# Altium PCB Minna_V01.PcbDoc (part 2 of 2)
Units mil, origin at the board's own origin, x right, y up, seen from the top; angles counter-clockwise.
Board outline 3650 x 2200 mil, 2 copper layers (Top Layer, Bottom Layer), stack 64.8 mil thick; 102 components, 109 nets, 591 pads, 273 vias.
Unrouted connection lines stored in the file: 80.
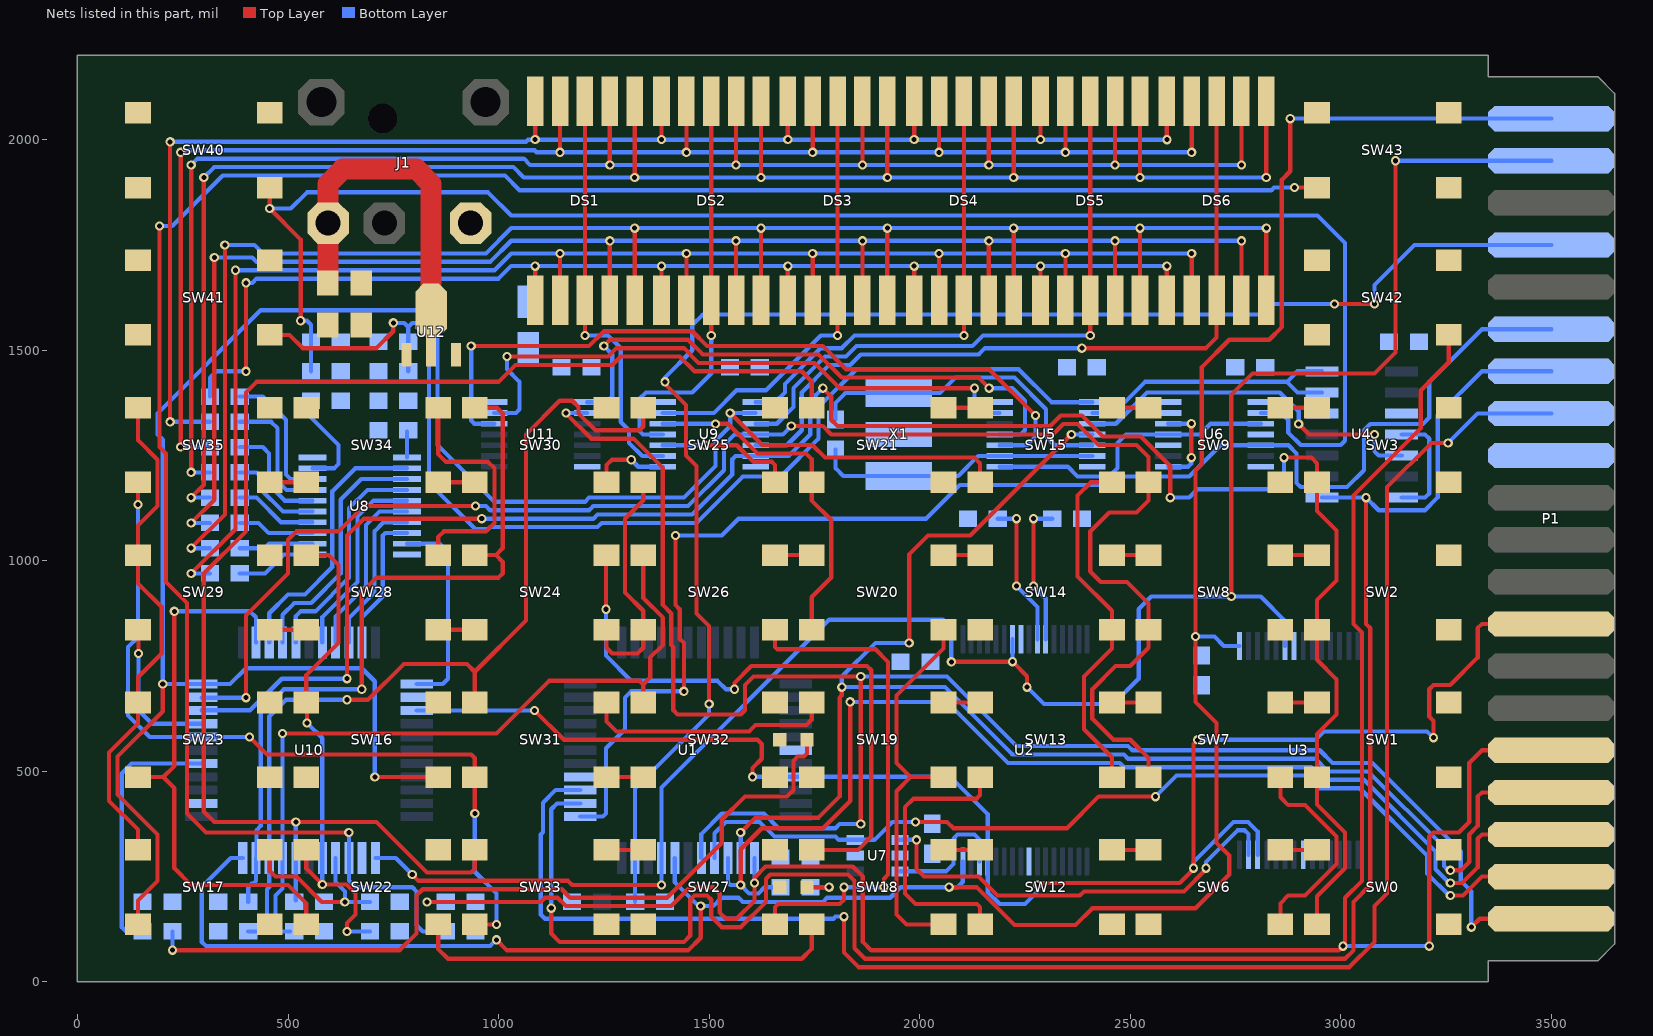
[diagram p2: the nets of this part, all layers, seen from the top]

## Via types
v1: diameter 22, hole 12, Top Layer to Bottom Layer, 273 vias

## Nets (pads, with @x,y where several pads share a name; then routed paths per layer and width w, separated by ;. In a path a pad name is that pad's centre, name@x,y a point inside that pad or via, vN(x,y) a via of type N, cw(c..) or ccw(c..) an arc to the next point about the centre after c; other vN are vias at no path point) (continued)
D7: P1.13 U1.8 U2.29 U3.26 U10.25 | length 3937
  Top Layer w10: v1(1085.51,644.49) 1155,575 1615,575 1625,565 1625,530 1602.99,507.99 v1(1602.99,487.01) ; v1(2280,230) 2285,230 2285,235 2617.53,235 v1@2651.26,268.74 ; v1(2650,270) 2650,565 v1(2660,575) ; v1(3220,580) 3220,620 3210,630 3210,695 3220,705 3260,705 3325,770 3325,840 3335,850 P1.13@3500,850
  Bottom Layer w10: U10.25@805.91,644.49 v1(1085.51,644.49) ; v1(1602.99,487.01) U1.8@1705.91,487.01 2072.99,487.01 2161.42,398.58 U2.29@2161.42,286.22 2161.42,213.58 2190,185 2250,185 2280,215 v1(2280,230) ; v1(2650,270) 2650,285 2745,380 2780,380 2802.56,357.44 U3.26@2802.56,301.97 ; v1(2660,575) 2940,575 2960,595 3205,595 v1(3220,580)
DATAIN: U10.35
DATAOUT: R27.1 U10.5 | length 617.5
  Bottom Layer w10: R27.1@154.57,120 115,120 105,130 105,495 128.5,518.5 U10.5@294.09,518.5
DS_A: DS1.7 DS2.7 DS3.7 DS4.7 DS5.7 DS6.7 R14.2 | length 4187.7
  Top Layer w10: v1(270,1210) v1(270,1940) ; v1(1264.06,1940.11) DS1.7@1264.06,2091.22 ; v1(1564.06,1940.11) DS2.7@1564.06,2091.22 ; v1(1864.06,1940.11) DS3.7@1864.06,2091.22 ; v1(2164.06,1940.11) DS4.7@2164.06,2091.22 ; v1(2464.06,1940.11) DS5.7@2464.06,2091.22 ; v1(2764,1940) DS6.7@2764.06,2091.22
  Bottom Layer w10: v1(270,1210) R14.2@314.57,1210 ; v1(270,1940) 285,1955 1060,1955 1074.94,1940.06 v1@2764,1940.06
DS_B: DS1.6 DS2.6 DS3.6 DS4.6 DS5.6 DS6.6 R15.2 | length 4446.5
  Top Layer w10: v1(270,1150) 300,1180 v1(300,1910) ; v1(1323.11,1910.22) DS1.6@1323.11,2091.22 ; v1(1623.11,1910.22) DS2.6@1623.11,2091.22 ; v1(1923.11,1910.22) DS3.6@1923.11,2091.22 ; v1(2223.11,1910.22) DS4.6@2223.11,2091.22 ; v1(2523.11,1910.22) DS5.6@2523.11,2091.22 ; v1(2823,1910.11) DS6.6@2823,2091
  Bottom Layer w10: v1(270,1150) R15.2@314.57,1150 ; v1(300,1910) 325,1935 1035,1935 1059.89,1910.11 v1(2823,1910.11)
DS_C: DS1.4 DS2.4 DS3.4 DS4.4 DS5.4 DS6.4 R16.2 | length 4007.8
  Top Layer w10: v1(270,1090) 325,1145 v1(325,1720) ; DS1.4@1264.06,1618.78 v1(1264.06,1759.89) ; DS2.4@1564.06,1618.78 v1(1564.06,1759.89) ; DS3.4@1864.06,1618.78 v1(1864.06,1759.89) ; DS4.4@2164.06,1618.78 v1(2164.06,1759.89) ; DS5.4@2464.06,1618.78 v1(2464.06,1759.89) ; DS6.4@2764.06,1618.78 v1(2764.06,1759.89)
  Bottom Layer w10: v1(270,1090) R16.2@314.57,1090 ; v1(325,1720) 415,1720 425,1710 980,1710 1029.94,1759.94 v1@2764,1759.94
DS_D: DS1.2 DS2.2 DS3.2 DS4.2 DS5.2 DS6.2 R18.2 | length 3762.6
  Top Layer w10: v1(270,970) 375,1075 v1(375,1690) ; DS1.2@1145.94,1618.78 v1(1145.94,1729.94) ; DS2.2@1445.94,1618.78 v1(1445.94,1729.94) ; DS3.2@1745.94,1618.78 v1(1745.94,1729.94) ; DS4.2@2045.94,1618.78 v1(2045.94,1729.94) ; DS5.2@2345.94,1618.78 v1(2345.94,1729.94) ; DS6.2@2645.94,1618.78 v1(2645.94,1729.94)
  Bottom Layer w10: v1(270,970) R18.2@314.57,970 ; v1(375,1690) 990,1690 1030,1730 v1@2646,1730
DS_DP: DS1.5 DS2.5 DS3.5 DS4.5 DS5.5 DS6.5 R17.2 | length 4330.6
  Top Layer w10: v1(270,1030) 350,1110 v1(350,1750) ; DS1.5@1323.11,1618.78 v1(1323.11,1789.89) ; DS2.5@1623.11,1618.78 v1(1623.11,1789.89) ; DS3.5@1923.11,1618.78 v1(1923.11,1789.89) ; DS4.5@2223.11,1618.78 v1(2223.11,1789.89) ; DS5.5@2523.11,1618.78 v1(2523.11,1789.89) ; DS6.5@2823.11,1618.78 v1(2823.11,1790)
  Bottom Layer w10: v1(270,1030) R17.2@314.57,1030 ; v1(350,1750) 420,1750 440,1730 970,1730 1030,1790 1068,1790 ; 1068.11,1790 v1(2823.11,1790)
DS_E: DS1.1 DS2.1 DS3.1 DS4.1 DS5.1 DS6.1 R11.2 | length 3035.9
  Top Layer w10: v1(400,1450) v1(400,1660) ; DS1.1@1086.89,1618.78 v1(1086.89,1699.78) ; DS2.1@1386.89,1618.78 v1(1386.89,1699.78) ; DS3.1@1686.89,1618.78 v1(1686.89,1699.78) ; DS4.1@1986.89,1618.78 v1(1986.89,1699.78) ; DS5.1@2286.89,1618.78 v1(2286.89,1699.78) ; DS6.1@2586.89,1618.78 v1(2586.89,1699.78)
  Bottom Layer w10: R11.2@314.57,1390 314.57,1434.57 330,1450 v1(400,1450) ; v1(400,1660) 415,1660 425,1670 1000,1670 1029.89,1699.89 v1@2587,1699.89
DS_F: DS1.9 DS2.9 DS3.9 DS4.9 DS5.9 DS6.9 R13.2 | length 3901.3
  Top Layer w10: v1(245,1270) v1(245,1970) ; v1(1145.94,1970.11) DS1.9@1145.94,2091.22 ; v1(1445.94,1970.11) DS2.9@1445.94,2091.22 ; v1(1745.94,1970.11) DS3.9@1745.94,2091.22 ; v1(2045.94,1970.11) DS4.9@2045.94,2091.22 ; v1(2345.94,1970.11) DS5.9@2345.94,2091.22 ; v1(2645.94,1970.06) DS6.9@2645.94,2091.22
  Bottom Layer w10: v1(245,1270) R13.2@314.57,1270 ; v1(245,1970) 250,1975 1085,1975 1089.94,1970.06 v1(2645.94,1970.06)
DS_G: DS1.10 DS2.10 DS3.10 DS4.10 DS5.10 DS6.10 R12.2 | length 3674.8
  Top Layer w10: v1(220,1330) v1(220,1995) ; v1(1086.89,2000.22) DS1.10@1086.89,2091.22 ; v1(1386.89,2000.22) DS2.10@1386.89,2091.22 ; v1(1686.89,2000.22) DS3.10@1686.89,2091.22 ; v1(1986.89,2000.22) DS4.10@1986.89,2091.22 ; v1(2286.89,2000.22) DS5.10@2286.89,2091.22 ; v1@2586.89,2000.11 DS6.10@2586.89,2091.22
  Bottom Layer w10: v1(220,1330) R12.2@314.57,1330 ; v1(220,1995) 1065,1995 1070.11,2000.11 v1(2587,2000.11)
FLASHC\E\: U2.30 U7.6 | length 316.8
  Bottom Layer w10: U7.6@1953.15,262.6 2062.6,262.6 2080,280 2080,340 2090,350 2130,350 2141.73,338.27 U2.30@2141.73,286.22
GND: C1.1 C2.1 C3.1 C4.1 C5.1 C6.1 C7.1 C8.1 C9.1 C10.1 C11.1 C21.1 C22.2 C23.2 C24.2 J1.2 P1.32 R6.1 R7.1 R25.2 R26.2 SW40.1 SW40.2 SW41.1 SW41.2 SW42.1 SW42.2 SW43.1 SW43.2 U1.26 U2.24 U3.21 U4.10 U5.7 U6.7 U7.2 U8.10 U9.7 U10.2 U11.7 U12.1 X1.2
H\A\L\T\: P1.18 R2.2 U1.14 | length 2783.6
  Top Layer w10: v1(1575,230) 1575,315 1625,365 1770,365 1835,430 v1(1835,665) ; v1(3260,235) 3288,235 3325,272 3325,340 3335,350 P1.18@3500,350
  Bottom Layer w10: U1.14@1544.49,294.09 1544.49,235.51 1550,230 v1(1575,230) 1595,210 1617,210 1632,225 R2.2@1669.57,225 ; v1(1835,665) 2065,665 2210,520 2475,520 2485,510 2930,510 2960,480 3055,480 3225,310 3225,267.47 3257.47,235 v1(3260,235)
I\N\T\: P1.16 R9.1 SW42.3 SW42.4 U1.12 | length 5122.2
  Top Layer w10: v1(830,190) 1100,190 1110,200 1140,200 1160,180 1410,180 1455,225 1510,225 1525,210 1525,165 1540,150 1565,150 1607.48,192.48 v1(1607.48,235) 1607.48,247.48 1634,274 1841,274 1865,250 1865,95 1885,75 2995,75 v1(3005,85) 3010,90 3010,200 3050,240 3050,830 3030,850 3030,1155 3190,1315 3190,1405 3256.5,1471.5 SW42.4@3256.5,1536.42 ; v1(3210,85) 3210,345 3220,355 3280,355 3305,380 3305,520 3335,550 P1.16@3500,550
  Bottom Layer w10: v1(830,190) R9.1@874.57,190 ; v1(1607.48,235) U1.12@1607.48,294.09 ; v1(3005,85) v1(3210,85)
I\O\R\Q\: P1.20 U1.16 U11.2 | length 4252.4
  Top Layer w10: v1(1160,1351.18) 1160,1350 1220,1290 1320,1290 1390,1220 1390,895 1410,875 1410,800 1415,795 1415,645 1425,635 1575,635 1585,645 1585,705 1605,725 v1(1860,725) v1(1860,375) ; v1(3310,130) 3330,150 P1.20@3500,150
  Bottom Layer w10: v1(1160,1351.18) U11.2@1210.24,1351.18 ; U1.16@1481.5,294.09 1481.5,351.5 1530,400 1630,400 1665,365 1800,365 1810,375 v1(1860,375) ; v1(1860,725) 2065,725 2230,560 2495,560 2505,550 2950,550 2980,520 3075,520 3285,310 3285,240 3310,215 v1(3310,130)
M\1\: P1.34 U1.24 U4.1 | length 4605.4
  Top Layer w10: v1(1125,175) 1125,115 1145,95 1440,95 1455,110 1455,195 1465,205 1495,205 1505,195 1505,155 1530,130 1575,130 1635,190 1635,245 1645,255 1830,255 1845,240 1845,80 1870,55 3010,55 3030,75 3030,190 3070,230 3070,840 3060,850 v1(3060,1150)
  Bottom Layer w10: v1(1125,175) 1125,410 1139.02,424.02 U1.24@1194.09,424.02 ; U4.1@2955.51,1150 v1(3060,1150) 3090,1120 3200,1120 3230,1150 3230,1345 3335,1450 P1.34@3500,1450
M\R\E\Q\: P1.19 U1.15 U7.3 | length 2312
  Top Layer w10: v1(1990,380) 2065,380 2080,365 2350,365 2425,440 v1(2560,440) ; v1(3260,205) 3290,205 3335,250 P1.19@3500,250
  Bottom Layer w10: U1.15@1512.99,294.09 1512.99,352.99 1540,380 1620,380 1655,345 1800,345 1807.6,337.4 U7.3@1846.85,337.4 1892.4,337.4 1935,380 v1(1990,380) ; v1(2560,440) 2610,490 2920,490 2950,460 3045,460 3205,300 3205,257.47 3257.47,205 v1(3260,205)
NetC20_1: C20.1 R1.1 SW41.3 SW41.4 U5.1 | length 2770.1
  Top Layer w10: SW41.4@456.5,1536.42 503.58,1536.42 535,1505 710,1505 750,1545 v1(750,1565)
  Bottom Layer w10: v1(750,1565) 775.87,1565 785.43,1555.43 ; R1.1@785.43,1450 C20.1@785.43,1520 785.43,1555.43 ; U5.1@2410.24,1376.77 2313.23,1376.77 2235,1455 1850,1455 1760,1365 1760,1290 1670,1200 1580,1200 1470,1090 1245,1090 1235,1080 980,1080 975,1075 945,1075 835,1185 835,1555 825,1565 795,1565 785.43,1555.43
NetC21_2: C21.2 R3.1 SW40.3 SW40.4 U6.2 | length 3828
  Top Layer w10: SW40.4@456.5,1886.42 v1(456.5,1836.5) 530,1762.99 v1(530,1570)
  Bottom Layer w10: v1(456.5,1836.5) 506.5,1836.5 545,1875 975,1875 1030,1820 2945,1820 3010,1755 3010,1285 3000,1275 2905,1275 2875,1305 2875,1335 2858.82,1351.18 U6.2@2810.24,1351.18 ; v1(530,1570) 545,1570 554.57,1560.43 R3.1@554.57,1520 C21.2@554.57,1450
NetD1_2: D1.2 R2.1 | length 97.1
  Top Layer w10: D1.2@1732.48,225 v1(1785,225)
  Bottom Layer w10: R2.1@1740.43,225 v1(1785,225)
NetD2_2: D2.2 R27.2 | length 1920.1
  Top Layer w10: v1(225.43,75.43) 765.43,75.43 805,115 805,205 820,220 1150,220 1170,200 1400,200 1530,330 1530,385 1585,440 1685,440 1700,455 1700,525 1710,535 1725,535 1732.48,542.48 D2.2@1732.48,575
  Bottom Layer w10: v1(225.43,75.43) R27.2@225.43,120
NetDS1_3: DS1.3 DS1.8 U9.2 | length 979.6
  Top Layer w10: v1(1205,1535) DS1.3@1205,1618.78 DS1.8@1205,2091.22
  Bottom Layer w10: v1(1205,1535) 1260,1535 1290,1505 1290,1330 1310,1310 1310,1280 1341.18,1248.82 U9.2@1389.76,1248.82
NetDS2_3: DS2.3 DS2.8 U9.4 | length 976.2
  Top Layer w10: v1(1505,1535) DS2.3@1505,1618.78 DS2.8@1505,2091.22
  Bottom Layer w10: U9.4@1389.76,1300 1343,1300 1335,1308 1335,1385 1350,1400 1460,1400 1505,1445 v1(1505,1535)
NetDS3_3: DS3.3 DS3.8 U9.6 | length 1047.6
  Top Layer w10: v1(1805,1535) DS3.3@1805,1618.78 DS3.8@1805,2091.22
  Bottom Layer w10: U9.6@1389.76,1351.18 1511.18,1351.18 1565,1405 1635,1405 1765,1535 v1(1805,1535)
NetDS4_3: DS4.3 DS4.8 U9.8 | length 1128.2
  Top Layer w10: v1(2105,1535) DS4.3@2105,1618.78 DS4.8@2105,2091.22
  Bottom Layer w10: U9.8@1610.24,1376.77 1656.77,1376.77 1680,1400 1680,1420 1765,1505 1815,1505 1845,1535 v1(2105,1535)
NetDS5_3: DS5.3 DS5.8 U9.10 | length 1464.1
  Top Layer w10: v1(2405,1535) DS5.3@2405,1618.78 DS5.8@2405,2091.22
  Bottom Layer w10: U9.10@1610.24,1325.59 1660.59,1325.59 1700,1365 1700,1410 1775,1485 1825,1485 1850,1510 2125,1510 2150,1535 v1(2405,1535)
NetDS6_3: DS6.3 DS6.8 U9.12 | length 1814.6
  Top Layer w10: v1(2385,1505) 2680,1505 2705,1530 DS6.3@2705,1618.78 DS6.8@2705,2091.22
  Bottom Layer w10: U9.12@1610.24,1274.41 1684.41,1274.41 1720,1310 1720,1400 1785,1465 1835,1465 1860,1490 2140,1490 2155,1505 v1(2385,1505)
NetR6_2: R6.2 U2.11 | length 342.9
  Top Layer w10: v1(2270,940) v1(2270,1100)
  Bottom Layer w10: v1(2270,940) 2299.21,910.79 U2.11@2299.21,813.78 ; v1(2270,1100) R6.2@2314.57,1100
NetR7_2: R7.2 U2.10 | length 351.3
  Top Layer w10: v1(2230,940) v1(2230,1100)
  Bottom Layer w10: R7.2@2185.43,1100 v1(2230,1100) ; v1(2230,940) 2279.53,890.47 U2.10@2279.53,813.78
NetR8_1: R8.1 U5.5 X1.3 | length 779.2
  Bottom Layer w10: R8.1@1800,1335.43 1800,1375 1823.43,1398.43 X1.3@1950,1398.43 2048.43,1398.43 2085,1435 2225,1435 2300,1360 2300,1295 2320.59,1274.41 U5.5@2410.24,1274.41
NetR8_2: R8.2 U5.6 U5.9 X1.1 | length 682
  Bottom Layer w10: R8.2@1800,1264.57 1800,1220 1818.43,1201.57 X1.1@1950,1201.57 2091.57,1201.57 2138.82,1248.82 U5.9@2189.76,1248.82 U5.6@2410.24,1248.82
NetR11_1: R11.1 U8.18 | length 329.7
  Bottom Layer w10: R11.1@385.43,1390 440,1390 495,1335 495,1205 506.02,1193.98 U8.18@557.8,1193.98
NetR12_1: R12.1 U8.17 | length 312.5
  Bottom Layer w10: R12.1@385.43,1330 460,1330 475,1315 475,1190 496.61,1168.39 U8.17@557.8,1168.39
NetR13_1: R13.1 U8.16 | length 269
  Bottom Layer w10: R13.1@385.43,1270 440,1270 455,1255 455,1180 492.2,1142.8 U8.16@557.8,1142.8
NetR14_1: R14.1 U8.15 | length 228.4
  Bottom Layer w10: R14.1@385.43,1210 425,1210 435,1200 435,1170 487.8,1117.2 U8.15@557.8,1117.2
NetR15_1: R15.1 U8.14 | length 196.5
  Bottom Layer w10: R15.1@385.43,1150 425,1150 483.39,1091.61 U8.14@557.8,1091.61
NetR16_1: R16.1 U8.13 | length 182.3
  Bottom Layer w10: R16.1@385.43,1090 430,1090 453.98,1066.02 U8.13@557.8,1066.02
NetR17_1: R17.1 U8.12 | length 176.7
  Bottom Layer w10: R17.1@385.43,1030 445,1030 455.43,1040.43 U8.12@557.8,1040.43
NetR18_1: R18.1 U8.11 | length 190.9
  Bottom Layer w10: R18.1@385.43,970 445,970 489.84,1014.84 U8.11@557.8,1014.84
NetR25_1: R25.1 U8.1 | length 61.6
  Bottom Layer w10: U8.1@782.2,1245.16 R25.1@782.2,1306.77
NetR26_1: R26.1 U8.19 | length 243.6
  Bottom Layer w10: R26.1@554.57,1380 554.57,1340.43 620,1275 620,1230 609.57,1219.57 U8.19@557.8,1219.57
NetU4_6: U4.6 U4.7 U5.2 | length 679.6
  Bottom Layer w10: U5.2@2410.24,1351.18 2461.18,1351.18 2535,1425 2872.5,1425 ; U4.6@2955.51,1400 2897.5,1400 2872.5,1425 ; U4.7@2955.51,1450 2897.5,1450 2872.5,1425
NetU4_11: U4.11 U4.14 | length 269.3
  Bottom Layer w10: U4.14@3144.49,1150 3200,1150 3210,1160 3210,1290 3200,1300 U4.11@3144.49,1300
NetU4_12: U4.12 U5.3 | length 868.2
  Top Layer w10: v1(2900,1325) 2925,1300 v1(3080,1300)
  Bottom Layer w10: U5.3@2410.24,1325.59 2465.59,1325.59 2540,1400 2855,1400 2900,1355 v1(2900,1325) ; v1(3080,1300) 3080,1260 3090,1250 U4.12@3144.49,1250
NetU5_8: U5.8 U6.3 U6.11 | length 717.3
  Bottom Layer w10: U5.8@2189.76,1223.23 2351.77,1223.23 2375,1200 2450,1200 2470,1220 2470,1280 2490,1300 U6.11@2589.76,1300 2665,1300 2690.59,1325.59 U6.3@2810.24,1325.59
NetU5_10: U5.10 U11.12 | length 1815.9
  Top Layer w10: v1(935,1510) 1215,1510 1250,1545 1460,1545 1495,1510 1770,1510 1825,1455 2165,1455 v1(2275,1345)
  Bottom Layer w10: v1(935,1510) 935,1333 942.41,1325.59 U11.12@989.76,1325.59 ; U5.10@2189.76,1274.41 2254.41,1274.41 2275,1295 v1(2275,1345)
NetU5_11: U5.11 U11.1 | length 1394.2
  Top Layer w10: v1(1250,1510) 1265,1525 1450,1525 1485,1490 1760,1490 1815,1435 2140,1435 v1(2165,1410)
  Bottom Layer w10: U11.1@1210.24,1376.77 1256.77,1376.77 1270,1390 1270,1490 v1(1250,1510) ; v1(2165,1410) 2220,1410 2250,1380 2250,1310 2240,1300 U5.11@2189.76,1300
NetU5_13: U5.13 U11.13 | length 1472.4
  Top Layer w10: v1(1020,1485) 1260,1485 1280,1505 1440,1505 1475,1470 1750,1470 1810,1410 v1(2130,1410)
  Bottom Layer w10: U11.13@989.76,1351.18 1041.18,1351.18 1050,1360 1050,1425 1020,1455 v1(1020,1485) ; v1(2130,1410) 2130,1360 2138.82,1351.18 U5.13@2189.76,1351.18
NetU6_8: U6.8 U6.12 | length 208.9
  Top Layer w10: v1(2645,1245) v1(2645,1325.59)
  Bottom Layer w10: U6.8@2589.76,1223.23 2637.23,1223.23 2645,1231 v1(2645,1245) ; U6.12@2590.35,1325.59 U6.12@2589.76,1325.59 v1(2645,1325.59)
NetU8_2: U8.2 U10.14 | length 644.3
  Bottom Layer w10: U10.14@455.51,805.91 455.51,875.51 500,920 540,920 605,985 605,1165 659.57,1219.57 U8.2@782.2,1219.57
NetU8_3: U8.3 U10.15 | length 597.2
  Bottom Layer w10: U10.15@487.01,805.91 487.01,872.01 515,900 555,900 625,970 625,1145 673.98,1193.98 U8.3@782.2,1193.98
NetU8_4: U8.4 U10.16 | length 547.2
  Bottom Layer w10: U10.16@518.5,805.91 518.5,868.5 530,880 565,880 645,960 645,1125 688.39,1168.39 U8.4@782.2,1168.39
NetU8_5: U8.5 U10.18 | length 466.5
  Bottom Layer w10: U10.18@581.5,805.91 581.5,866.5 665,950 665,1105 702.8,1142.8 U8.5@782.2,1142.8
NetU8_6: U8.6 U10.19 | length 419.5
  Bottom Layer w10: U10.19@612.99,805.91 612.99,867.99 685,940 685,1085 717.2,1117.2 U8.6@782.2,1117.2
NetU8_7: U8.7 U10.20 | length 375.3
  Bottom Layer w10: U10.20@644.49,805.91 644.49,864.49 705,925 705,1070 726.61,1091.61 U8.7@782.2,1091.61
NetU8_8: U8.8 U10.21 | length 334.1
  Bottom Layer w10: U10.21@675.98,805.91 675.98,865.98 725,915 725,1060 731.02,1066.02 U8.8@782.2,1066.02
NetU8_9: U8.9 U10.23 | length 485.5
  Bottom Layer w10: U8.9@782.2,1040.43 859.57,1040.43 880,1020 880,720 867.48,707.48 U10.23@805.91,707.48
NMI: P1.17 U1.13 U5.4 | length 3620.9
  Top Layer w10: v1(1575,355) 1610,390 1760,390 1810,440 1810,675 1815,680 v1(1815,700) ; v1(1975,805) 1975,1015 2020,1060 2120,1060 v1(2360,1300) ; v1(3260,265) 3285,265 3305,285 3305,350 3325,370 3325,440 3335,450 P1.17@3500,450
  Bottom Layer w10: U1.13@1575,295.08 v1(1575,355) ; v1(1975,805) 1895,805 1815,725 v1(1815,700) 2060,700 2220,540 2485,540 2495,530 2940,530 2970,500 3065,500 3245,320 3245,275 3255,265 v1(3260,265) ; v1(2360,1300) U5.4@2410.24,1300
PA0: R19.1 SW0.1 SW0.2 SW6.1 SW6.2 SW12.1 SW12.2 SW18.1 SW18.2 SW24.1 SW24.2 SW30.1 SW30.2 U10.43 | length 3574.8
  Top Layer w10: v1(675,695) 675,925 710,960 1000,960 1010,970 1010,997.16 993.58,1013.58 ; SW24.1@943.5,1013.58 993.58,1013.58 ; SW30.1@943.5,1363.58 996.42,1363.58 1010,1350 1010,1030 993.58,1013.58 ; v1(1255,885) 1255,1013.58 SW24.2@1255,1015 ; v1(1560,695) 1560,710 1600,750 1875,750 1885,740 1885,345 1853.58,313.58 SW18.1@1743.5,313.58 ; SW18.2@2056.5,313.58 SW12.1@2143.5,313.58 ; SW12.2@2456.5,313.58 SW6.1@2543.5,313.58 ; SW6.2@2856.5,313.58 SW0.1@2943.5,313.58
  Bottom Layer w10: R19.1@405.43,190 405.43,225.43 413,233 417,233 424.02,240.02 U10.43@424.02,294.09 ; U10.43@425,295.08 425,360 435,370 435,640 490,695 v1(675,695) ; v1(1255,885) 1255,775 1315,715 1520,715 1540,695 v1(1560,695)
PA1: R20.1 SW1.1 SW1.2 SW7.1 SW7.2 SW13.1 SW13.2 SW19.1 SW19.2 SW25.1 SW25.2 SW31.1 SW31.2 U10.42 | length 3040.6
  Top Layer w10: v1(640,670) 690,670 775,755 925,755 943.5,736.5 ; SW31.1@943.5,663.58 943.5,736.5 ; SW31.2@1256.5,663.58 1256.5,618.5 1280,595 1595,595 1610,610 1731,610 1743.5,622.5 SW19.1@1743.5,663.58 ; SW25.1@1343.5,1363.58 1343.5,1318.5 1335,1310 1230,1310 1190,1350 1190,1365 1175,1380 1145,1380 1065,1300 1065,857.99 943.5,736.5 ; SW19.2@2056.5,663.58 SW13.1@2143.5,663.58 ; SW13.2@2456.5,663.58 SW7.1@2543.5,663.58 ; SW7.2@2856.5,663.58 SW1.1@2943.5,663.58
  Bottom Layer w10: R20.1@405.43,120 443,120 450,127 450,220 455.51,225.51 U10.42@455.51,294.09 455.51,630.51 495,670 v1(640,670)
PA2: R21.1 SW2.1 SW2.2 SW8.1 SW8.2 SW14.1 SW14.2 SW20.1 SW20.2 SW26.1 SW26.2 SW32.1 SW32.2 U10.41 | length 2155.9
  Top Layer w10: v1(487.01,590) 995,590 1120,715 1335,715 1343.5,706.5 ; SW32.1@1343.5,663.58 1343.5,706.5 ; SW26.1@1343.5,1013.58 1343.5,911.5 1390,865 1390,800 1360,770 1360,722.99 1343.5,706.5 ; SW26.2@1656.5,1013.58 SW20.1@1743.5,1013.58 ; SW20.2@2056.5,1013.58 SW14.1@2143.5,1013.58 ; SW14.2@2456.5,1013.58 SW8.1@2543.5,1013.58 ; SW8.2@2856.5,1013.58 SW2.1@2943.5,1013.58
  Bottom Layer w10: v1(487.01,590) U10.41@487.01,294.09 487.01,222.01 470,205 470,127 477,120 R21.1@504.57,120
PA3: R22.1 SW3.1 SW3.2 SW9.1 SW9.2 SW15.1 SW15.2 SW21.1 SW21.2 SW27.1 SW27.2 SW33.1 SW33.2 U10.40 | length 3788.5
  Top Layer w10: SW33.1@943.5,313.58 943.5,268.5 935,260 830,260 710,380 v1(518.5,380) 325,380 300,405 300,970 400,1070 400,1400 425,1425 1000,1425 1040,1465 1270,1465 1290,1485 1430,1485 1465,1450 1720,1450 1743.5,1426.5 SW21.1@1743.5,1363.58 ; SW33.2@1256.5,313.58 SW27.1@1343.5,313.58 ; SW21.2@2056.5,1363.58 SW15.1@2143.5,1363.58 ; SW15.2@2456.5,1363.58 SW9.1@2543.5,1363.58 ; SW9.2@2856.5,1363.58 SW3.1@2943.5,1363.58
  Bottom Layer w10: R22.1@518.5,193.94 U10.40@518.5,294.09 v1(518.5,380)
PA4: R23.1 SW16.1 SW16.2 SW22.1 SW22.2 SW28.1 SW28.2 SW34.1 SW34.2 U10.38 | length 1808.9
  Top Layer w10: SW22.1@543.5,313.58 543.5,269.49 v1(581.5,231.5) ; SW16.1@543.5,663.58 543.5,728.5 620,805 620,990 596.42,1013.58 SW28.1@543.5,1013.58 ; v1(545,615) SW16.1@545,662.09 ; v1@578.5,231.5 v1(581.5,231.5) ; v1(640,120) 640,140 660,160 660,210 638.5,231.5 v1(581.5,231.5) ; SW28.2@856.5,1013.58 856.5,1056.5 870,1070 970,1070 990,1090 990,1220 975,1235 875,1235 856.5,1253.5 SW34.2@856.5,1363.58
  Bottom Layer w10: v1(545,615) 581.5,578.5 U10.38@581.5,294.09 v1(581.5,231.5) ; v1(640,120) R23.1@694.57,120
PA5: R24.1 SW17.1 SW17.2 SW23.1 SW23.2 SW29.1 SW29.2 SW35.1 SW35.2 U10.37 | length 1623.9
  Top Layer w10: SW17.1@143.5,313.58 143.5,361.5 75,430 75,545 143.5,613.5 SW23.1@143.5,663.58 143.5,723.5 200,780 200,890 143.5,946.5 SW29.1@143.5,1013.58 143.5,1083.5 190,1130 190,1240 143.5,1286.5 SW35.1@143.5,1363.58 ; SW17.2@456.5,313.58 456.5,263.5 470,250 520,250 580,190 v1(635,190)
  Bottom Layer w10: U10.37@612.99,294.09 612.99,237.01 635,215 v1(635,190) R24.1@694.57,190
PC0: SW0.3 SW0.4 SW1.3 SW1.4 SW2.3 SW2.4 SW3.3 SW3.4 U9.13 U10.9 | length 4744.8
  Top Layer w10: v1(640,720) 640,1060 680,1100 v1(960,1100) ; v1(1770,1410) 1770.16,1410 1786.02,1394.14 1786.02,1393.98 1790,1390 1790,1335 1805,1320 2310,1320 2335,1345 2385,1345 2435,1295 2525,1295 2595,1225 v1(2595,1150) ; v1(2865,1245) 2930,1245 2943.5,1231.5 SW3.3@2943.5,1186.42 2943.5,1118.5 2990,1072.01 2990,952.99 2943.5,906.5 SW2.3@2943.5,836.42 2943.5,765 2990,718.5 2990,635 2943.5,588.5 SW1.3@2943.5,486.42 2943.5,421.5 3010,355 3010,270 2943.5,203.5 SW0.3@2943.5,136.42
  Bottom Layer w10: U10.9@294.61,645 410,645 485,720 v1(640,720) ; v1(960,1100) 1225,1100 1235,1110 1460,1110 1555,1205 1555,1241 1562.82,1248.82 U9.13@1610.24,1248.82 1688.82,1248.82 1740,1300 1740,1380 v1(1770,1410) ; v1(2595,1150) 2640,1150 2660,1170 2850,1170 2865,1185 v1(2865,1245)
PC1: SW6.3 SW6.4 SW7.3 SW7.4 SW8.3 SW8.4 SW9.3 SW9.4 U9.11 U10.10 | length 4382.5
  Top Layer w10: v1(400,675) 400,870 500,970 500,1050 520,1070 620,1070 680,1130 v1(945,1130) ; v1(1695,1320) 1770,1320 1790,1300 2315.96,1300 2340.96,1325 2375,1325 2425,1275 2515,1275 2543.5,1246.5 SW9.3@2543.5,1186.42 2543.5,1143.5 2515,1115 2450,1115 2405,1070 2405,975 2430,950 2492.01,950 2543.5,898.5 SW8.3@2543.5,836.42 2543.5,793.5 2500,750 2465,750 2410,695 2410,625 2460,575 2500,575 2543.5,531.5 SW7.3@2543.5,486.42 ; SW6.4@2856.5,136.42 2856.5,186.5 2875,205 2915,205 2990,280 2990,345 2915,420 2875,420 2856.5,438.5 SW7.4@2856.5,486.42
  Bottom Layer w10: U10.10@295.08,675 v1(400,675) ; v1(945,1130) 970,1130 980,1120 1215,1120 1225,1130 1450,1130 1535,1215 1535,1275 1560,1300 U9.11@1610.24,1300 1675,1300 v1(1695,1320)
PC2: SW12.3 SW12.4 SW13.3 SW13.4 SW14.3 SW14.4 SW15.3 SW15.4 SW16.3 SW16.4 SW17.3 SW17.4 U9.9 U10.11 | length 6467.1
  Top Layer w10: SW17.3@143.5,136.42 143.5,193.5 190,240 190,350 95,445 95,535 202.52,642.52 v1(202.52,707.48) ; v1(706,486.42) SW16.4@856.5,486.42 ; v1(1550,1351.18) 1626.18,1275 1745,1275 1775,1245 2130,1245 2143.5,1231.5 SW15.3@2143.5,1186.42 ; SW12.3@2143.5,136.42 2143.5,177.5 2136,185 1990,185 1965,210 1965,415 1985,435 2135,435 2143.5,443.5 SW13.3@2143.5,486.42 ; SW13.4@2456.5,486.42 2456.5,533.5 2390,600 2390,725 2456.5,791.5 SW14.4@2456.5,836.42 2456.5,881.5 2375,962.99 2375,1155 2406.42,1186.42 SW15.4@2456.5,1186.42
  Bottom Layer w10: v1(706,486.42) 706,714 675,745 400,745 362.48,707.48 U10.11@294.09,707.48 v1(202.52,707.48) 202.52,1287.48 190,1300 190,1350 435,1595 830,1595 855,1570 855,1275 990,1140 1205,1140 1215,1150 1440,1150 1515,1225 1515,1285 1550,1320 v1(1550,1351.18) U9.9@1610.24,1351.18
PC3: SW18.3 SW18.4 SW19.3 SW19.4 SW20.3 SW20.4 SW21.3 SW21.4 SW22.3 SW22.4 SW23.3 SW23.4 U9.5 U10.13 | length 4154.1
  Top Layer w10: SW23.3@143.5,486.42 203.58,486.42 ; v1(230,880) 230,512.84 203.58,486.42 ; SW22.3@543.5,136.42 543.5,186.5 500,230 270,230 230,270 230,460 203.58,486.42 ; SW22.4@856.5,136.42 856.5,78.5 880,55 1720,55 1743.5,78.5 SW18.3@1743.5,136.42 ; v1@1515,1325.59 1544.41,1325.59 1615,1255 1730,1255 1743.5,1241.5 SW21.3@1743.5,1186.42 1743.5,1143.5 1790,1097.01 1790,960 1743.5,913.5 SW20.3@1743.5,836.42 ; SW18.4@2056.5,136.42 1968.58,136.42 1945,160 1945,452.84 1978.58,486.42 ; SW19.4@2056.5,486.42 1978.58,486.42 ; SW20.4@2056.5,836.42 2056.5,791.5 1945,680 1945,520 1978.58,486.42
  Bottom Layer w10: v1(230,880) 410,880 424.02,865.98 U10.13@424.02,805.91 ; U9.5@1389.76,1325.59 v1@1515,1325.59
  other v1: 1515,1325
PC4: SW24.3 SW24.4 SW25.3 SW25.4 SW26.3 SW26.4 SW27.3 SW27.4 SW28.3 SW28.4 SW29.3 SW29.4 U9.3 U10.8 | length 2623.7
  Top Layer w10: v1(145,780) SW29.3@145,834.92 ; SW29.4@456.5,836.42 SW28.3@543.5,836.42 ; SW28.4@856.5,836.42 SW24.3@943.5,836.42 ; SW24.4@1256.5,836.42 1256.5,793.5 1270,780 1330,780 1343.5,793.5 SW26.3@1343.5,836.42 1343.5,881.5 1300,925 1300,1100 1343.5,1143.5 SW25.3@1343.5,1186.42 ; v1(1490,1274.41) 1565.59,1274.41 1605,1235 1649,1235 1656.5,1227.5 SW25.4@1656.5,1186.42 ; SW27.4@1656.5,136.42 1656.5,177.5 1664,185 1810,185 1820,195 v1(1820,225) ; SW26.4@1656.5,836.42 1656.5,795.5 1662,790 1895,790 1925,760 1925,255 1915,245 v1(1915,225)
  Bottom Layer w10: v1(145,780) 145,645 177.01,612.99 U10.8@294.09,612.99 ; U9.3@1389.76,1274.41 v1(1490,1274.41) ; v1(1820,225) v1(1915,225)
PC5: SW30.3 SW30.4 SW31.3 SW31.4 SW32.3 SW32.4 SW33.3 SW33.4 SW34.3 SW34.4 SW35.3 SW35.4 U9.1 U10.7 | length 2344.1
  Top Layer w10: v1(143.5,1133.5) SW35.3@143.5,1186.42 ; v1(408.5,581.5) 450,540 935,540 943.5,531.5 SW31.3@943.5,486.42 v1(943.5,400) ; SW35.4@456.5,1186.42 SW34.3@543.5,1186.42 ; SW34.4@856.5,1186.42 SW30.3@943.5,1186.42 ; SW33.3@943.5,136.42 v1(995,136.42) ; SW31.4@1256.5,486.42 SW32.3@1343.5,486.42 ; SW30.4@1256.5,1186.42 1256.5,1227.5 1269,1240 v1(1315,1240)
  Bottom Layer w10: v1(143.5,1133.5) 143.5,818.5 120,795 120,632.99 171.5,581.5 U10.7@294.09,581.5 v1(408.5,581.5) ; v1(943.5,400) 943.5,261.5 995,210 v1(995,136.42) ; v1(1315,1240) 1331.77,1223.23 U9.1@1389.76,1223.23
R\D\: P1.40 U1.18 U2.32 U3.1 U10.44 | length 5852.4
  Top Layer w10: v1(995,100) 1020,75 1450,75 1480,105 v1(1480,180) ; v1(2070,225) 2135,225 2225,135 2370,135 2410,175 2655,175 2735,255 2735,300 2705,330 2705,615 2655,665 v1(2655,820) 2655,1215 2670,1230 2670,1460 2735,1525 2830,1525 2860,1555 2860,1905 2880,1925 v1(2880,2050)
  Bottom Layer w10: U10.44@392.52,294.09 364.09,294.09 295,225 295,95 305,85 980,85 v1(995,100) ; U1.18@1418.5,294.09 1418.5,236.5 v1@1475,180 ; v1(1480,180) 1510,180 1530,200 1570,200 1580,190 1770,190 1780,200 1930,200 1955,225 v1(2070,225) 2090,225 2102.36,237.36 U2.32@2102.36,286.22 ; v1(2655,820) 2700,820 2721.97,798.03 U3.1@2759.25,798.03 ; v1(2880,2050) P1.40@3500,2050
R\F\S\H\: P1.33 U1.25 | length 4034.3
  Top Layer w10: v1(1820,155) 1820,70 1855,35 3020,35 3080,95 3080,180 3110,210 3110,1175 3215,1280 v1(3255,1280)
  Bottom Layer w10: U1.25@1194.09,455.51 1135.51,455.51 1105.53,425.53 1105.53,355.53 1100,350 1100,160 1110,150 1795,150 1800,155 v1(1820,155) ; v1(3255,1280) 3325,1350 P1.33@3500,1350
R\S\T\: P1.35 U1.23 U6.5 | length 3393.9
  Top Layer w10: v1(1420,1060) 1420,895 1430,885 1430,815 1440,805 v1(1440,690)
  Bottom Layer w10: U1.23@1194.09,392.52 1247.52,392.52 1255,400 1255,555 1300,600 1300,675 1315,690 v1(1440,690) ; v1(1420,1060) 1530,1060 1570,1100 2015,1100 2095,1180 2460,1180 2480,1200 2640,1200 2714.41,1274.41 U6.5@2810.24,1274.41 2875.59,1274.41 2895,1255 2895,1185 2905,1175 3015,1175 3055,1215 3055,1310 3070,1325 3195,1325 3210,1340 3210,1425 3335,1550 P1.35@3500,1550
RAMC\E\: U3.27 U7.4 | length 1050.9
  Top Layer w10: v1(1992.6,337.4) 1992.6,267.4 2010,250 2140,250 2185,205 2380,205 2390,215 2627.53,215 2680,267.47 v1(2680,270)
  Bottom Layer w10: U7.4@1953.15,337.4 v1(1992.6,337.4) ; v1(2680,270) 2680,285 2755,360 2772,360 2780.91,351.09 U3.27@2780.91,301.97
USER: R10.1 SW43.3 SW43.4 U10.36 | length 5081.8
  Top Layer w10: v1(195,1795) 195,1270 210,1255 210,950 260,900 260,400 305,355 v1(644.49,355) ; v1(2890,1886.42) SW43.3@2943.5,1886.42
  Bottom Layer w10: v1(195,1795) 225,1795 345,1915 1015,1915 1050,1880 2835,1880 2841.42,1886.42 v1(2890,1886.42) ; v1(644.49,355) U10.36@644.49,294.09 644.49,240.51 660,225 795,225 805,215 805,135 820,120 R10.1@874.57,120
VCC: C1.2 C2.2 C3.2 C4.2 C5.2 C6.2 C7.2 C8.2 C9.2 C10.2 C11.2 C20.2 C23.1 C24.1 D1.1 D2.1 R1.2 R3.2 R4.1 R5.1 R9.2 R10.2 R19.2 R20.2 R21.2 R22.2 R23.2 R24.2 U1.6 U2.8 U3.7 U4.5 U5.14 U6.1 U6.4 U6.10 U6.13 U6.14 U7.5 U8.20 U9.14 U10.24 U11.14 U12.3
VIN: C22.1 J1.1 U12.2 | length 906.5
  Top Layer w20: U12.2@840,1497.01 U12.2@840,1595.43
  Top Layer w50: C22.1@594.63,1660 J1.1@594.63,1801.52 ; J1.1@595.08,1801.97 595.08,1895.08 630,1930 805,1930 840,1895 U12.2@840,1595.43
W\A\I\T\: P1.37 R4.2 U1.21 | length 3642.8
  Top Layer w10: v1@1395,1420 1445,1370 1445,1250 1470,1225 1470,875 1500,845 v1(1500,660) ; v1(2985,1610) v1(3080,1610)
  Bottom Layer w10: R4.2@1324.02,190.55 U1.21@1324.02,294.09 1324.02,459.02 1500,635 v1(1500,660) ; v1@1395,1435 1460,1500 1460,1560 1485,1585 2815,1585 2840,1610 v1(2985,1610) ; v1(3080,1610) 3080,1655 3175,1750 P1.37@3500,1750
  other v1: 1395,1425
W\R\: P1.39 U1.19 U2.7 U3.6 U10.34 | length 4803.4
  Top Layer w10: v1(795,255) 810,240 1165,240 1175,230 v1(1387.01,230) ; v1@2075.47,760.47 v1(2220.47,760.47) 2255,725.94 v1(2255,700) ; v1(2740,915) 2740,1395 2790,1445 3080,1445 3130,1495 v1(3130,1950)
  Bottom Layer w10: U10.34@707.48,294.09 755.91,294.09 v1(795,255) ; v1(1387.01,230) U1.19@1387.01,294.09 1387.01,462.01 1785,860 2055,860 2075,840 v1(2075,760) ; v1(2220.47,760.47) U2.7@2220.47,813.78 ; v1(2255,700) 2295,660 2460,660 2520,720 2520,885 2550,915 v1(2740,915) 2810,915 2867.52,857.48 U3.6@2867.52,798.03 ; v1(3130,1950) P1.39@3500,1950
pads on no net: J1.3 J1.4 J1.5 J1.6 P1.11 U1.11 U1.17 U1.33 U1.39 U2.6 U2.9 U4.4 U4.8 U4.9 U4.13 U10.12 U10.17 U10.22 U10.39 U11.6 U11.8

## Text inside footprints (layer, text, board x,y; h text height)
P1: Bottom Overlay "40" at 3320,2025 h48; Bottom Overlay "21" at 3320,125 h48; Top Overlay "20" at 3240,200 h48; Top Overlay "1" at 3305,1950 h48